# Altium PCB Copy of PCB1.PcbDoc
Units mm, origin at the board's own origin, x right, y up, seen from the top; angles counter-clockwise.
Board outline 104.8 x 101.6 mm, 2 copper layers (Top Layer, Bottom Layer); 24 components, 27 nets, 107 pads, 0 vias.
Unrouted connection lines stored in the file: 20.
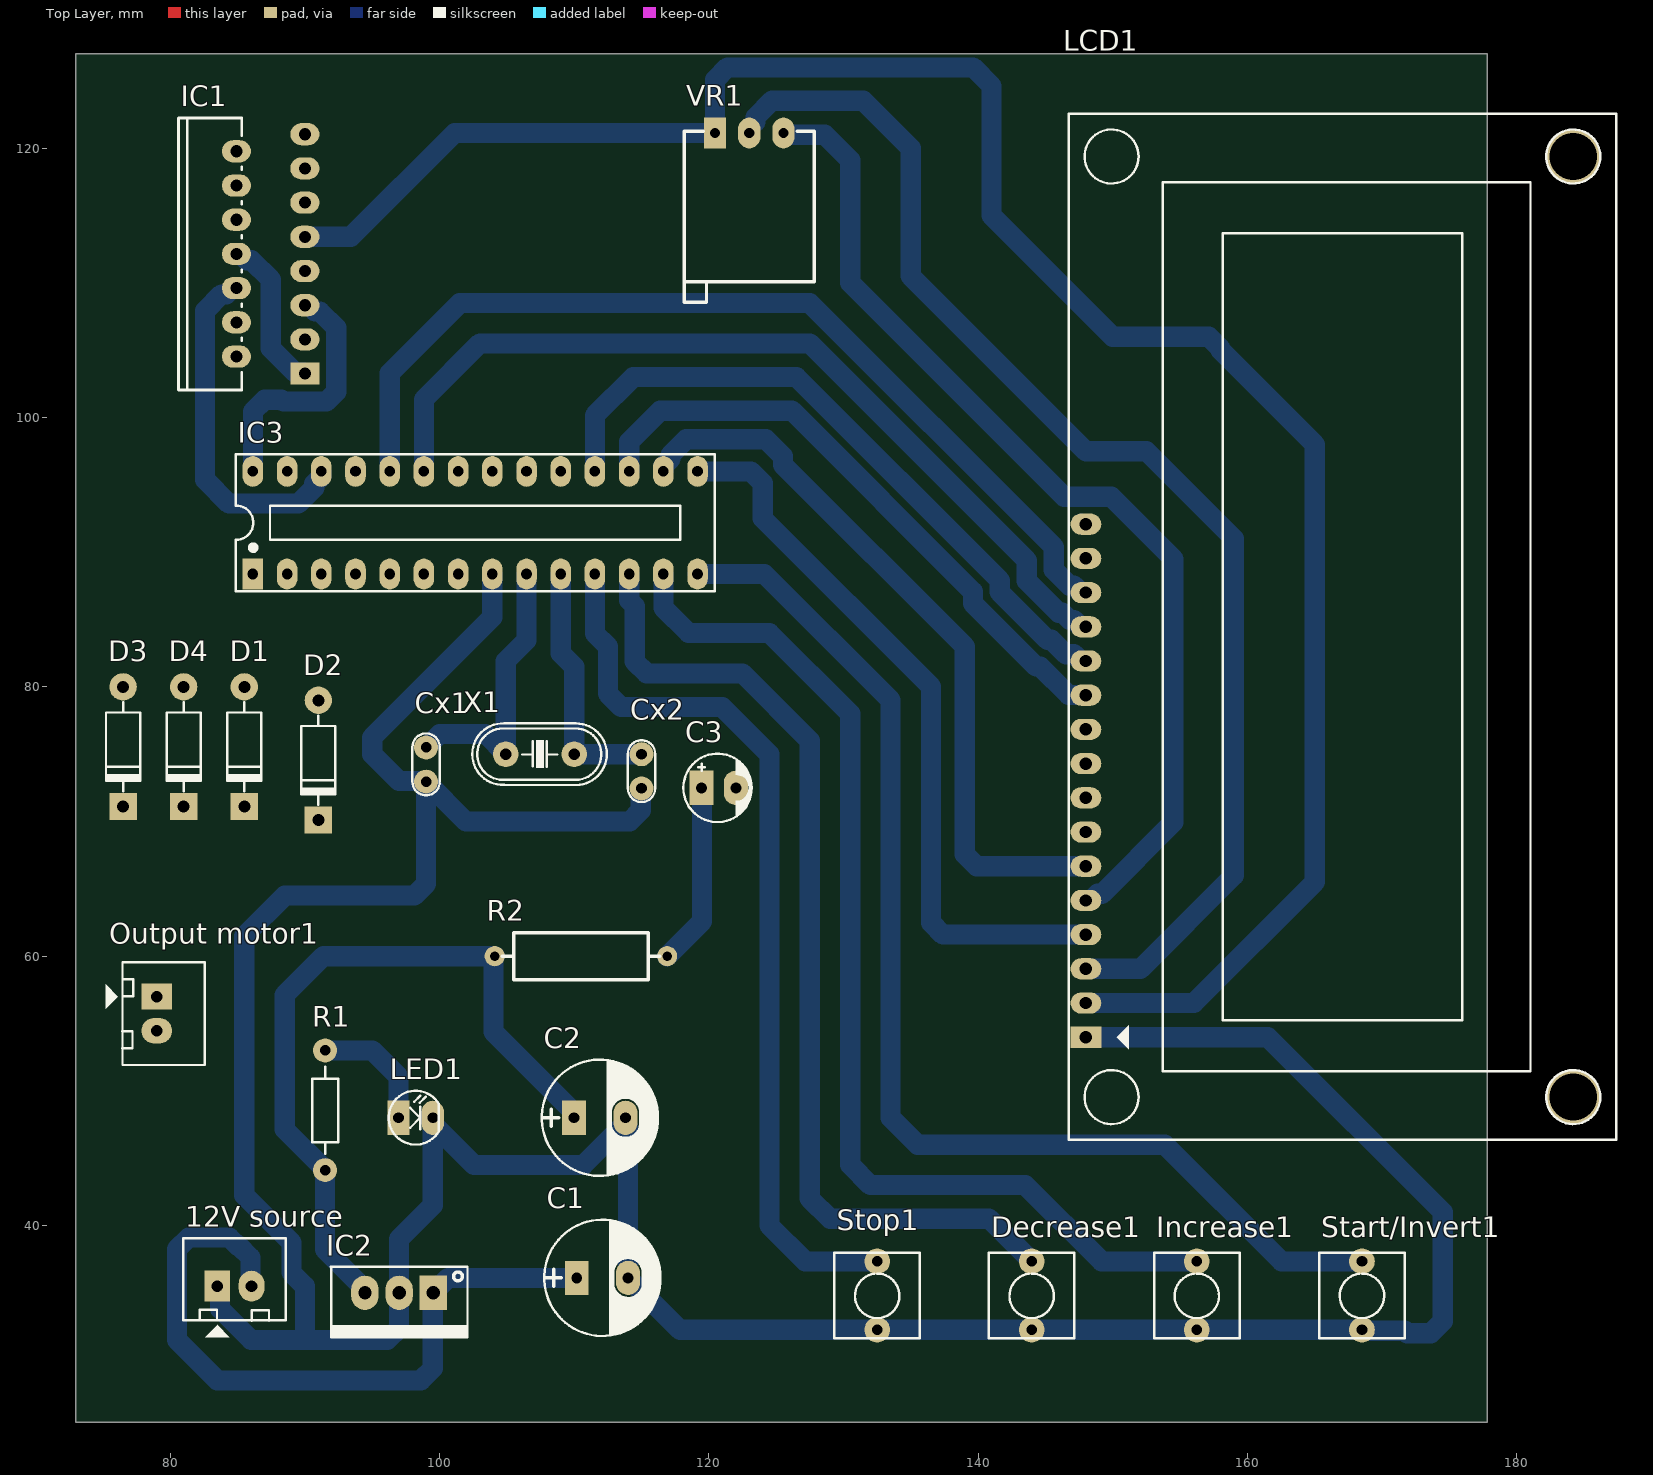
[diagram p0: Top Layer view]
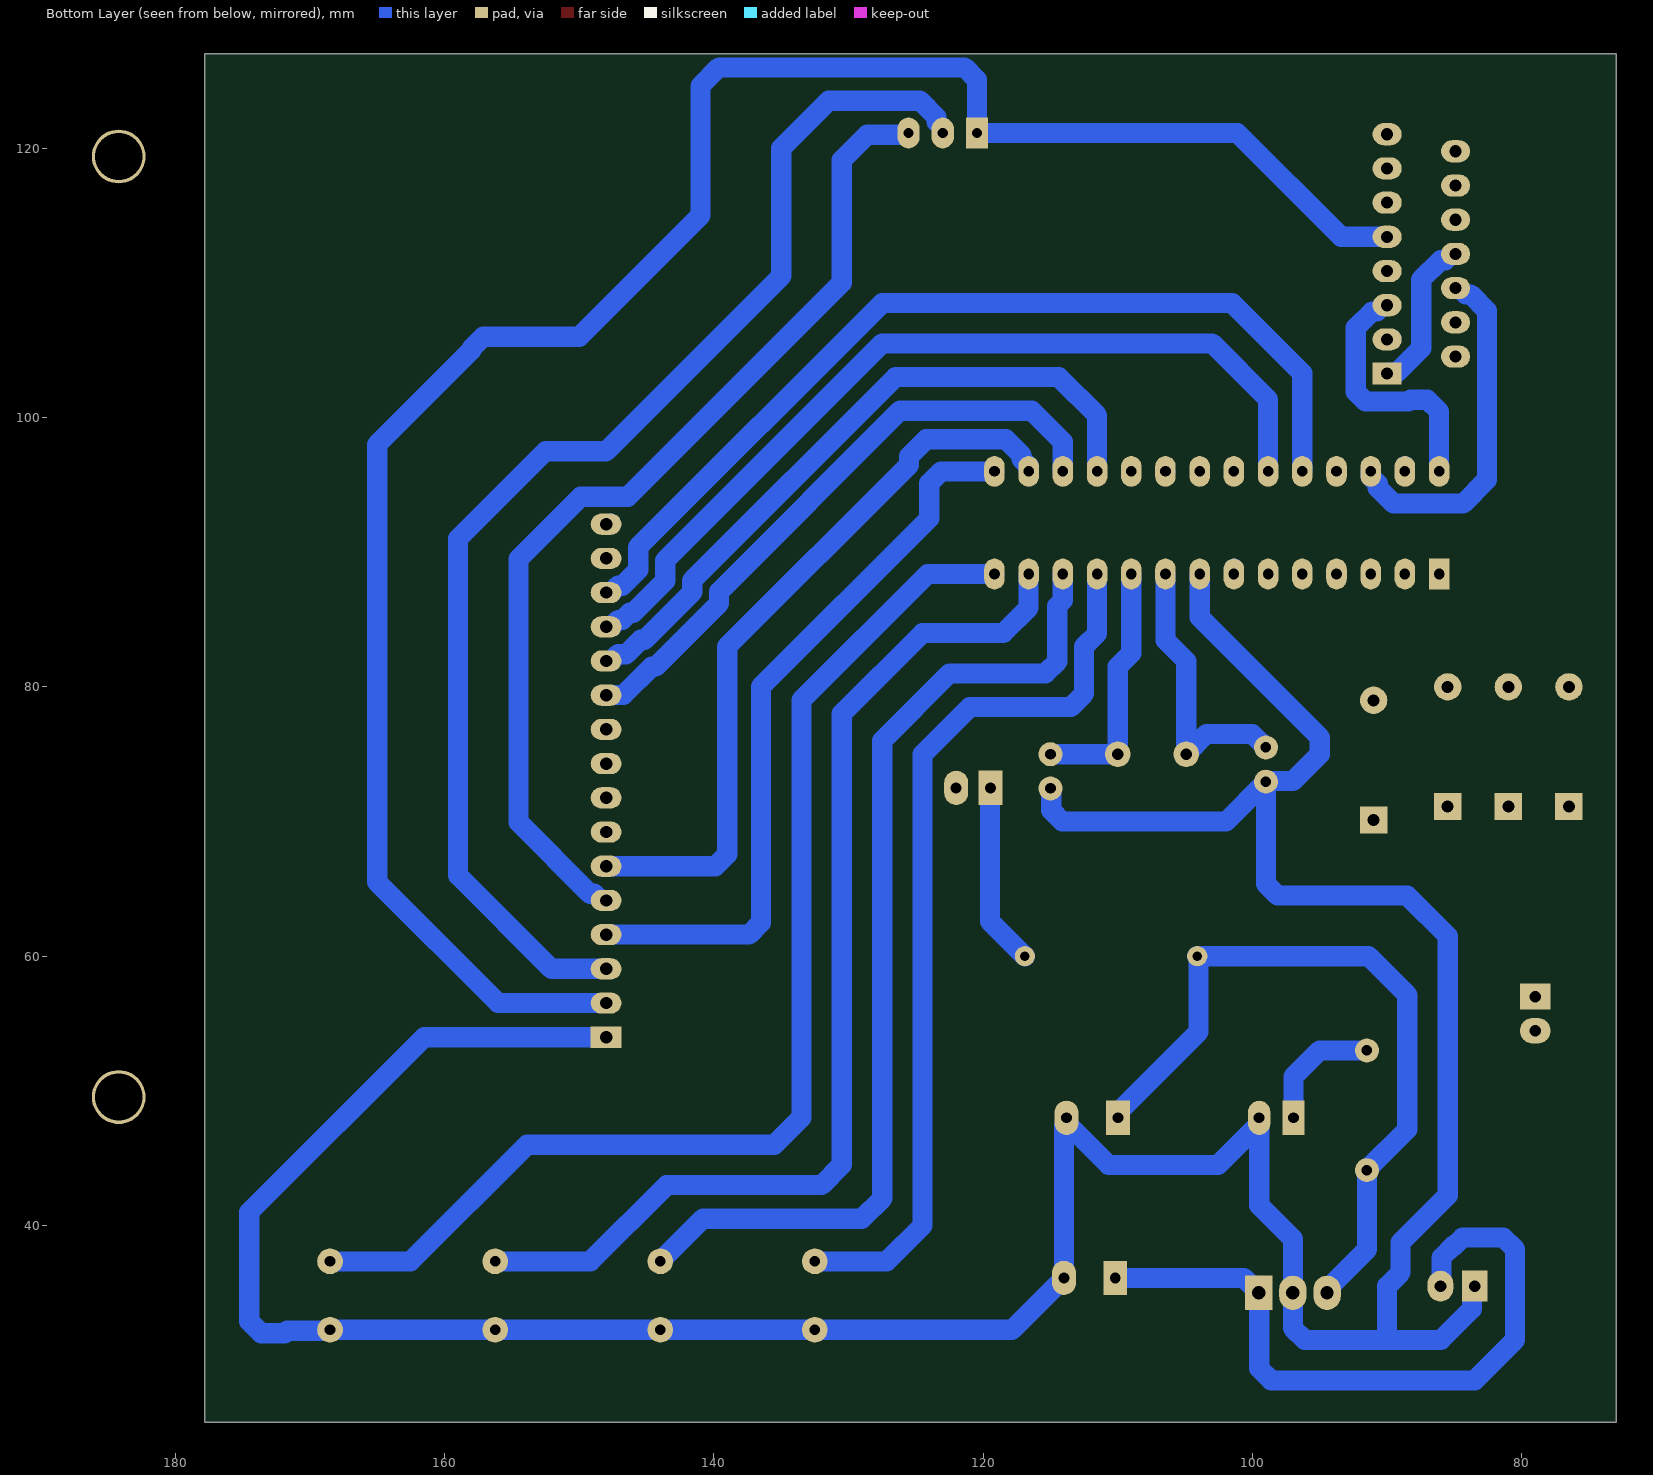
[diagram p1: Bottom Layer view, seen from below]

## Layer stack, top to bottom
Top Solder: solder mask 0.0102, Solder Resist, Dk 3.5
Top Layer: signal copper 0.0356
Dielectric 1: dielectric 0.32, FR-4, Dk 4.8
Bottom Layer: signal copper 0.0356
Bottom Solder: solder mask 0.0102, Solder Resist, Dk 3.5

## Board outline
73,25.4 177.8,25.4 177.8,127 73,127

## Design rules (kind name [scope] priority, off if disabled: settings)
Clearance [All] p1: gap=0.5 ignorepadtopadclearanceinfootprint=FALSE
HoleSize [All] p1: absolutevalues=TRUE maxlimit=2.54 minlimit=1 maxpercent=80.000 minpercent=20.000
PlaneClearance [All] p1: clearance=2
PolygonConnect [All] p1: connectstyle=Direct reliefconductorwidth=0.254 reliefentries=4 polygonreliefangle="90 Angle" airgapwidth=0.254
RoutingVias [All] p1: holewidth=0.711 width=1.27 viastyle="Through Hole" minholewidth=0.711 minwidth=1.27 maxholewidth=0.711 maxwidth=1.27
SolderMaskExpansion [All] p1: expansion=0.102 istentingtop=FALSE
SupplyNets "Schematic Supply Nets" [InNet('GND')] p1: voltage=0.000
SupplyNets "Schematic Supply Nets_2" [InNet('+5')] p2: voltage=0.000
SupplyNets "Schematic Supply Nets_1" [InNet('+12')] p3: voltage=0.000
Width VCC [InNet('+5')] p1: maxlimit=2 minlimit=1 preferedwidth=1.5
Width [All] p2: maxlimit=1.5 minlimit=1 preferedwidth=1.5
28 further rules are at their usual default settings.

## Components (designator, comment, footprint, x,y, rotation, side; value= is the part's Value field where it differs from the comment)
"12V source" "JP2" CON2#1 83.5,35.5 r0 top value="Connector 2"
C1 "220uF/35V" CP1.5/3.4 110.19,36.11 r0 top value=100uF/35V/50V
C2 "220uF/35V" CP1.5/3.4 110,48 r0 top value=100uF/35V/50V
C3 "10uF" CP1/2 119.46,72.5 r0 top value=10uF/50V
Cx1 "22pF" CN1 99,72.96 r90 top value=33pF
Cx2 "22pF" CN1 115,72.46 r90 top value=33pF
D1 "1N4007" D1A 85.5,80 r90 top
D2 "1N4007" D1A 91,79 r90 top
D3 "1N4007" D1A 76.5,80 r90 top
D4 "1N4007" D1A 81,80 r90 top
Decrease1 "SW" SW2 143.973,32.257 r90 top value="SW chip 2 pin"
IC1 "L298" DIP15SL2 87.46,112.15 r90 top
IC2 "LM7805" QTO-220 99.54,35 r180 top
IC3 "ATmega8-L" DIP28/W0.3 86.14,88.38 r0 top
Increase1 "SW" SW2 156.237,32.257 r90 top value="SW chip 2 pin"
LCD1 "LCD16x2A" LCD16X2 148,53.98 r90 top
LED1 "LED" LED-3 96.96,48 r0 top value="LED 3 ly Single Colour"
"Output motor1" "JP2" CON2#2 79,57 r270 top value="Connector 2"
R1 "220R" R1/4W 91.5,53 r270 top value="R1/4W - 1K"
R2 "10k" "tro vach 1/2w" 110.5,60 r180 top
Start/Invert1 "SW" SW2 168.5,32.257 r90 top value="SW chip 2 pin"
Stop1 "SW" SW2 132.5,32.257 r90 top value="SW chip 2 pin"
VR1 "1K" "BIEN TRO VI CHINH NAM" 123,121 r0 top
X1 "16Mhz" XT2 107.46,75 r0 top value=4Mhz

## Footprints (in the part's own frame and the unit in brackets; to place one, negate y for a bottom-side part, rotate by r counter-clockwise, add the part's x,y. Pads: shape width x height; smd on the part's side, far side on the other; paste and mask are expansions set on the pad)
"BIEN TRO VI CHINH NAM" [mil]
  rect 65x90 hole 30: 1(-100,5)
  oval 65x90 hole 30: 2(0,5) 3(100,5)
  silkscreen extent -190,-490 190,10, body extent -187,-490 188,10, height 226
CN1 [mil]
  round 70 hole 31: 1(0,0) 2(100,0)
  silkscreen extent -40,-40 141,40, body extent -60,-30 170,37, height 265
CON2#1 [mil] "CON2"
  oval 75x90 hole 34: 2(100,0)
  rect 75x90 hole 34: "  "(0,0)
  silkscreen extent -100,-150 200,140, body extent -68,-70 168,107, height 236
CON2#2 [mil] "CON2"
  rect 75x90 hole 34: 1(0,0)
  oval 75x90 hole 34: 2(100,0)
  silkscreen extent -100,-150 200,140, body extent -68,-70 168,107, height 236
CP1.5/3.4 [mil] "Tu hoa 220->470uF,16V, 470uF/16V,25V"
  rect 70x100 hole 32: 1(0,0)
  oval 70x100 hole 32: 2(150,0)
  silkscreen extent -95,-170 245,170, body extent -85,-157 230,157, height 446
CP1/2 [mil] "Tu hoa < 22uF/16>50V"
  rect 70x100 hole 32: 1(0,0)
  oval 70x100 hole 32: 2(100,0)
  silkscreen extent -53,-100 147,100, body extent -49,-99 149,99, height 287
D1A [mil] "Diode 1A, W 100mil, L 350mil"
  round 80 hole 35: 1(0,0)
  rect 80x80 hole 35: 2(-350,0)
  silkscreen extent -305,-50 -45,50, body extent -386,-33 34,36, height 84
DIP15SL2 [mil] "TO, Thru-Hole, Vertical, Heatsink Mounted; 15 Bent Staggered Leads; Pitch 1.27 mm"
  rect 65x85 hole 35.43: 1(-350,-100)
  oval 65x85 hole 35.43: 2(-300,100) 3(-250,-100) 4(-200,100) 5(-150,-100) 6(-100,100) 7(-50,-100) 8(0,100) 9(50,-100) 10(100,100) 11(150,-100) 12(200,100) 13(250,-100) 14(300,100) 15(350,-100)
  silkscreen extent -398,84 398,269, body extent -382,-110 390,247, height 895
DIP28/W0.3 [mil] "28 PIN, W 300mil, Pin to pin 100mil"
  rect 60x90 hole 31: 1(0,0)
  oval 60x90 hole 31: 2(100,0) 3(200,0) 4(300,0) 5(400,0) 6(500,0) 7(600,0) 8(700,0) 9(800,0) 10(900,0) 11(1000,0) 12(1100,0) 13(1200,0) 14(1300,0) 15(1300,300) 16(1200,300) 17(1100,300) 18(1000,300) 19(900,300) 20(800,300) 21(700,300) 22(600,300) 23(500,300) 24(400,300) 25(300,300) 26(200,300) 27(100,300) 28(0,300)
  silkscreen extent -50,-50 1350,350, body extent -50,-10 1367,300, height 200
LCD16X2 [mil] "LCD dipslay 16x2, 16 pin"
  rect 62x90 hole 36: 1(0,0)
  oval 62x90 hole 36: 2(100,0) 3(200,0) 4(300,0) 5(400,0) 6(500,0) 7(600,0) 8(700,0) 9(800,0) 10(900,0) 11(1000,0) 12(1100,0) 13(1200,0) 14(1300,0) 15(1400,0) 16(1500,0)
  round 157.48 on Top Solder: "Hole 0"(-175,-75)
  round 157.48 hole 137.8: "Hole 0"(-175,-1425) "Hole 0"(2575,-1425)
  round 157.48 on Top Overlay: "Hole 0"(2575,-75)
  silkscreen extent -300,-1550 2700,50, body extent -315,-1360 2855,77, height 414
LED-3 [mil] "LED 2 PIN, 3ly Only colour"
  rect 65x100 hole 32: 1(0,0)
  oval 65x100 hole 32: 2(100,0)
  silkscreen extent -29,-78 118,79, body extent -13,-75 125,75, height 217
QTO-220 [mil] "TO-220 - 1-2-3"
  rect 80x100 hole 39: 1(0,0)
  oval 80x100 hole 39: 2(100,0) 3(200,0)
  silkscreen extent -100,-76 300,130, body extent -119,-64 322,121, height 755
R1/4W [mil] "R 1/4W, 2 Pin, 350mil"
  round 70 hole 31: 1(0,0) 2(350,0)
  silkscreen extent 48,-38 302,38, body extent -40,-47 386,47, height 111
SW2 [mil] "SW button 2pin, 250x 250 mil"
  round 75 hole 31: 1(0,0) 2(200,0)
  silkscreen extent -25,-125 225,125
"tro vach 1/2w" [mm]
  round 1.5 hole 0.7: 1(-6.4,0) 2(6.4,0)
  silkscreen extent -5.84,-1.75 5.84,1.75, body extent -6.62,-1.75 6.62,1.75, height 3.5
XT2 [mil] "Footpin for Crystal 2 pin"
  round 75 hole 34: 1(-100,0) 2(100,0)
  silkscreen extent -198,-90 195,90, body extent -233,-93 213,90, height 138

## Part data
"12V source" "Output motor1": library part Con2, "Connector 2"
C1 C2: library part CP3, "Cap 100uF/35V - 470uF/16V", Description 1="1000uF/6,3V - 470uF/16V - 330uF - 25V", Description 2="220uF/35V - 100uF/50V - 63V - 4,7uF/200V", Description 3="22uF => 33uF100V - 3,3uF => 4,7uF/250V", Description 4="2,2uF =>3,3uF/350 - 2,2uF/400V - 1uF/450V"
C3: library part CP1, "Cap P  0,1uF < 22uF , 16 - 50V", Description 1="10 => 220uF/6,3V/10V - 10uF => 100uF/16V", Description 2="0,1uF => 33uF/50V - 10uF => 22uF/63V", Description 3="0,47uF => 10uF/100V"
Cx1 Cx2: library part CN0, "Cremic For Xtal 1pF => 100pF"
D1 D2 D3 D4: library part D1A, "Diode 1A"
Decrease1 Increase1 Start/Invert1 Stop1: library part SW2, "Switch button 2 pin"
IC1: "Dual Full-H Driver", ComponentLink1Description="Manufacturer Link", ComponentLink1URL=http://www.ti.com/, DatasheetVersion=Jun-1990, Note="The tab is elec is connected to GND pin", PackageDescription="TO, Thru-Hole, Vertical, Heatsink Mounted; 15 Bent Staggered Leads; Pitch 1.27 mm", PackageReference=KV015, Published=15-May-2002, Publisher="Altium Limited"
IC2: library part LM78xx, "On ap +, from + 5 to + 24VDC"
IC3: "8-Bit AVR Microcontroller with 8K Bytes of In-System Programmable Flash Memory"
LCD1: library part LCD16x2, "LCD dipslay 16 char, 2 line"
LED1: "LED Single colour Green and Red"
R1: library part R, "Resistor 1/4W"
R2: library part "Tro Vach 1/2W 5% 10k", "Cắm", Chung_Loai=Cắm, Don_Vi=Con, Ma_Hang=MH006206, So_Chan=2, Ten_Linh_Kien="Trở 5% 1/2w 10k"
VR1: library part "Bien Tro Tinh Chinh 1K Nam", "Cắm", Chung_Loai=Cắm, Don_Vi=Con, Ma_Hang=MH003234, Ten_Linh_Kien="Biến Trở VR 102-1K 3296W"
X1: library part XT2, "Crystal For all Crystal 2pin."

## Nets (pads, with @x,y where several pads share a name; then routed paths per layer and width w, separated by ;. In a path a pad name is that pad's centre, name@x,y a point inside that pad or via, vN(x,y) a via of type N, cw(c..) or ccw(c..) an arc to the next point about the centre after c; other vN are vias at no path point)
+5: C2.1 IC1.9 IC2.3 IC3.7 IC3.20 LCD1.2 R1.2 R2.2 VR1.1 | length 209.4
  Bottom Layer w1.5: IC1.9 93.42,113.42 101.127,121.127 VR1.1 120.46,125.081 121.379,126 139.621,126 141,124.621 141,115 150,106 157.121,106 158,105.121 158,105 165,98 165,65.5 156.02,56.52 LCD1.2 ; IC2.3 94.46,35.254 91.5,38.214 91.5,44.128 88.5,47.128 88.5,57.121 91.379,60 R2.2 104,59.9 104,54.381 110,48.381 C2.1 ; IC3.7 IC3.7@101.38,88.767 ; IC3.20@106.455,95.995 IC3.20
+12: "12V source.2" C1.1 D1.2 D2.2 IC1.4 IC2.1 | length 52.8
  Bottom Layer w1.5: 86.04,35.5 85.963,35.578 85.963,37.621 85.084,38.5 85,38.5 84.393,39.107 81.379,39.107 80.5,38.228 80.5,31.5 83.5,28.5 98.621,28.5 99.5,29.379 99.5,34.96 IC2.1 99.54,35.254 99.806,35.52 100.06,35.52 100.65,36.11 C1.1
B0: IC3.14 Start/Invert1.2 | length 88.6
  Bottom Layer w1.5: IC3.14 124.12,88.38 133.5,79 133.5,48 135.5,46 153.864,46 162.527,37.337 Start/Invert1.2
B1: IC3.15 LCD1.4 | length 54.9
  Bottom Layer w1.5: IC3.15 123.121,96 124,95.121 124,92.5 136.5,80 136.5,62.479 137.379,61.6 LCD1.4
B2: IC3.16 LCD1.6 | length 55.3
  Bottom Layer w1.5: IC3.16 116.62,96.387 117.148,96.915 117.148,97.214 118.327,98.393 124.228,98.393 125.5,97.121 125.5,96.5 139,83 139,67.559 139.879,66.68 LCD1.6
B3: IC3.17 LCD1.11 | length 46.3
  Bottom Layer w1.5: IC3.17 114.085,96.005 114.085,98.206 116.379,100.5 126.183,100.5 139.607,87.076 139.607,86.211 144.315,81.503 144.604,81.503 146.712,79.394 147.986,79.394 LCD1.11
B4: IC3.18 LCD1.12 | length 51
  Bottom Layer w1.5: IC3.18 111.54,100.161 114.379,103 126.512,103 141.607,87.905 141.607,87.039 145.144,83.503 145.432,83.503 146.512,82.423 147.122,82.423 147.624,81.92 LCD1.12
B5: IC3.19
C0: IC3.23 LCD1.13 | length 65.8
  Bottom Layer w1.5: IC3.23 98.84,101.34 103,105.5 127.5,105.5 143.607,89.393 143.607,87.868 145.972,85.503 146.26,85.503 146.8,84.963 147.122,84.963 147.624,84.46 LCD1.13
C1: IC3.24 LCD1.14 | length 71.1
  Bottom Layer w1.5: IC3.24 96.3,103.3 101.5,108.5 127.5,108.5 145.607,90.393 145.607,88.696 146.8,87.503 147.122,87.503 147.624,87 LCD1.14
C3: IC1.6 IC3.26 | length 26.3
  Bottom Layer w1.5: IC1.6 84.625,109.61 84.161,109.145 83.806,109.145 82.591,107.93 82.591,95.379 84.362,93.607 89.513,93.607 90.692,94.786 90.692,95.085 91.22,95.613 IC3.26
C4: IC1.7 IC3.27 | length 0.4
  Bottom Layer w1.5: IC3.27 IC3.27@88.68,96.387
C5: IC1.5 IC3.28 | length 19.1
  Bottom Layer w1.5: IC3.28 86.14,100.447 87.019,101.326 88.261,101.326 88.403,101.184 91.597,101.184 92.33,101.917 92.33,106.66 91.114,107.875 90.759,107.875 90.295,108.34 IC1.5
D0: IC3.2
D2: IC3.4
D4: IC3.6
D5: IC3.11 Stop1.2 | length 67.2
  Bottom Layer w1.5: IC3.11 111.54,83.96 112.5,83 112.5,79.5 113.5,78.5 121,78.5 124.5,75 124.5,40 127.163,37.337 Stop1.2
D6: Decrease1.2 IC3.12 | length 74.5
  Bottom Layer w1.5: IC3.12 114.085,88.375 114.085,86.415 114.5,86 114.5,81.879 115.379,81 122.5,81 127.5,76 127.5,42 129,40.5 140.81,40.5 Decrease1.2
D7: IC3.13 Increase1.2 | length 81.8
  Bottom Layer w1.5: IC3.13 116.625,88.375 116.625,85.875 118.5,84 124.5,84 130.5,78 130.5,44.5 132,43 143.5,43 149.163,37.337 Increase1.2
GND: C1.2 C2.2 C3.2 Cx1.1 Cx2.1 D3.1 D4.1 Decrease1.1 IC1.1 IC1.8 IC2.2 IC3.8 IC3.22 Increase1.1 LCD1.1 LCD1.5 LED1.2 Start/Invert1.1 Stop1.1 VR1.3 | length 347.9
  Bottom Layer w1.5: 83.5,35.5 83.703,35.298 83.703,33.797 86,31.5 90,31.5 ; IC1.8 85.215,112.15 85.679,111.685 86.034,111.685 87.46,110.259 87.46,105.151 89.275,103.335 89.925,103.335 IC1.1 ; LED1.2 LED1.2@99.5,47.556 ; IC3.8 103.915,88.375 103.915,85.158 95,76.243 95,75 96.987,73.013 98.947,73.013 Cx1.1 ; C2.2 C2.2@113.81,47.619 ; Cx2.1 114.947,72.407 114.947,70.825 114.121,70 101.96,70 Cx1.1 ; VR1.3 125.54,121.076 125.61,121.006 128.616,121.006 130.5,119.121 130.5,110 146.383,94.117 149.883,94.117 154.5,89.5 154.5,69.943 149.2,64.643 148.878,64.643 148.376,64.14 LCD1.5 ; LCD1.1 161.52,53.98 174.5,41 174.5,32.879 173.621,32 171.866,32 171.687,32.179 168.577,32.179 Start/Invert1.1 Increase1.1 Decrease1.1 Stop1.1 117.853,32.257 114.434,35.675 114.128,35.675 114,35.804 C1.2 114,47.354 113.81,47.544 C2.2@113.81,47.619 ; 90,31.5 96.121,31.5 97,32.379 IC2.2 97,39 99.5,41.5 LED1.2@99.5,47.556 ; 90,31.5 90,35.5 89,36.5 89,38.743 85.5,42.243 85.5,61.5 88.5,64.5 98.121,64.5 99,65.379 Cx1.1 ; LED1.2@99.5,47.556 102.555,44.5 110.691,44.5 C2.2@113.81,47.619
NetC3_1: C3.1 IC3.1 R2.1 | length 13.6
  Bottom Layer w1.5: R2.1 119.5,62.6 119.5,72.46 C3.1
NetCx1_2: Cx1.2 IC3.9 X1.1 | length 21
  Bottom Layer w1.5: Cx1.2 99.018,75.5 100.018,76.5 103.42,76.5 X1.1 104.92,81.92 106.46,83.46 IC3.9
NetCx2_2: Cx2.2 IC3.10 X1.2 | length 18.8
  Bottom Layer w1.5: IC3.10 109,82.5 110,81.5 X1.2 Cx2.2
NetLED1_1: LED1.1 R1.1 | length 9.3
  Bottom Layer w1.5: R1.1 95,53 96.96,51.04 LED1.1
OUT1: "Output motor1.1" D1.1 D3.2 IC1.2
OUT2: "Output motor1.2" D2.1 D4.2 IC1.3 | length 0.3
  Bottom Layer w1.5: IC1.3@89.67,105.83 89.7,105.8 IC1.3
VR: LCD1.3 VR1.2 | length 95.3
  Bottom Layer w1.5: VR1.2 123,121.485 123.465,121.95 123.465,122.304 124.68,123.52 131.48,123.52 135,120 135,110.5 148,97.5 152.5,97.5 159,91 159,66 152.06,59.06 LCD1.3
pads on no net: "12V source.  " "LCD1.Hole 0" IC1.10 IC1.11 IC1.12 IC1.13 IC1.14 IC1.15 IC3.3 IC3.5 IC3.21 IC3.25 LCD1.7 LCD1.8 LCD1.9 LCD1.10 LCD1.15 LCD1.16
copper on no net: | length 0.4
  Bottom Layer w1.5: 147.63,92.115 147.665,92.08 148,92.08